# Altium PCB bdcmc25.PcbDoc (part 4 of 4)
Units mil, origin at the board's own origin, x right, y up, seen from the top; angles counter-clockwise.
Board outline 7750 x 2750 mil, 4 copper layers (Layer 1, Layer 2 (GND), Layer 3 (GND), Layer 4), stack 23.756 mil thick; 330 components, 156 nets, 997 pads, 1122 vias.
Unrouted connection lines stored in the file: 39.
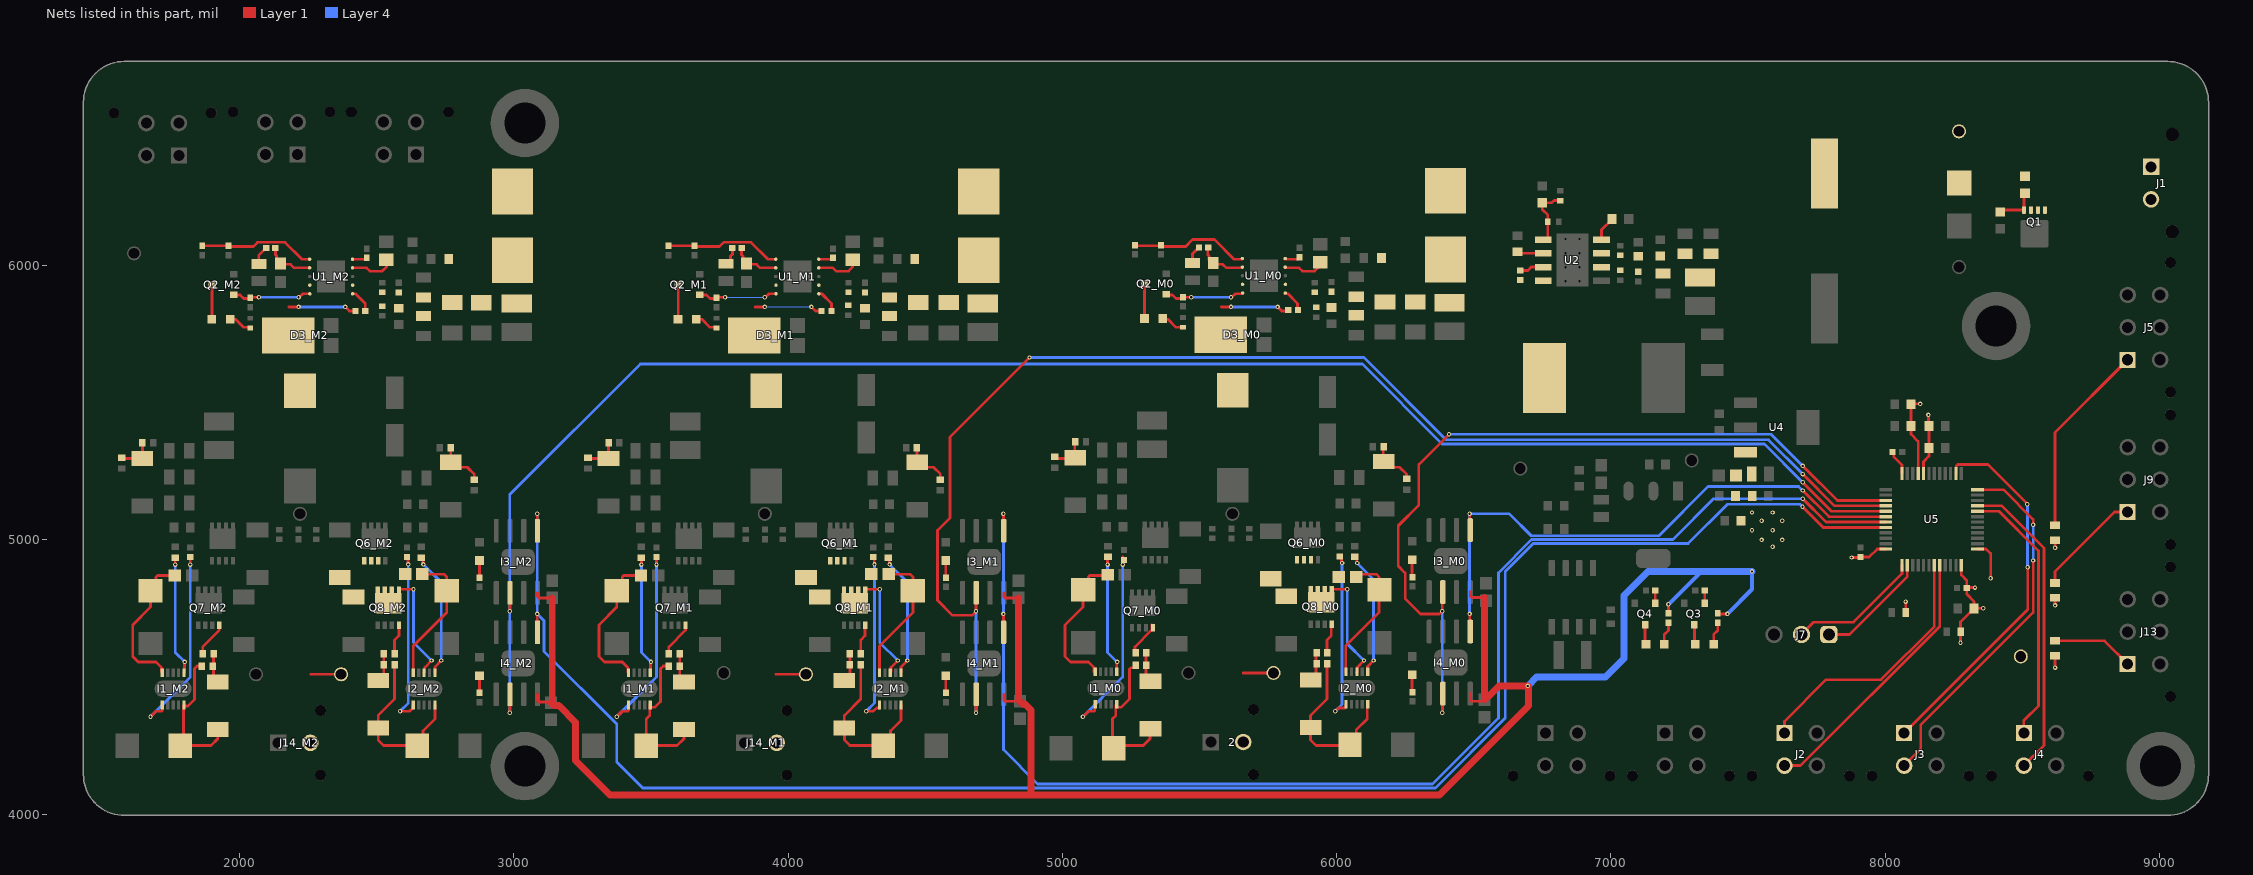
[diagram p5: the nets of this part, all layers, seen from the top]

## Via types
v1: diameter 20, hole 10, Layer 1 to Layer 4, 760 vias
v2: diameter 16, hole 8, Layer 1 to Layer 4, 340 vias
v3: diameter 23.62, hole 11.81, Layer 1 to Layer 4, 15 vias
v4: diameter 19.68, hole 7.87, Layer 1 to Layer 4, 7 vias

## Nets (pads, with @x,y where several pads share a name; then routed paths per layer and width w, separated by ;. In a path a pad name is that pad's centre, name@x,y a point inside that pad or via, vN(x,y) a via of type N, cw(c..) or ccw(c..) an arc to the next point about the centre after c; other vN are vias at no path point) (continued)
M-_M0: 2.2 C60_M0.1 C60_M1.1 C60_M2.1 D9_M0.1 D9_M1.1 D9_M2.1 D16_M0.2 D16_M1.2 D16_M2.2 I2_M0.3 I2_M1.3 I2_M2.3 J14_M1.2 J14_M2.2 Q6_M0.2 Q6_M1.2 Q6_M2.2 Q8_M0.3 Q8_M1.3 Q8_M2.3 TP9_M0.1 TP9_M1.1 TP9_M2.1 | length 1526
  Layer 1 w10: 2260,4510 TP9_M0.1@2370,4510 ; Q8_M2.3@2580.71,4815.51 2585.2,4820 v2(2633.84,4820) ; I2_M2.3@2672.47,4516.1 2675.35,4518.98 2675.35,4535.35 v2(2700,4560) ; 3955,4510 TP9_M1.1@4065,4510 ; Q8_M1.3@4280.71,4815.51 4285.2,4820 v2(4333.84,4820) ; I2_M1.3@4372.47,4516.1 4375.35,4518.98 4375.35,4535.35 v2(4400,4560) ; 5660,4515 TP9_M2.1@5770,4515 ; Q8_M0.3@5980.71,4815.51 5985.2,4820 v2(6038.84,4820) ; I2_M0.3@6072.47,4516.1 6075.35,4518.98 6075.35,4535.35 v2(6100,4560)
  Layer 4 w10: v2(2633.84,4820) 2633.84,4626.16 v2(2700,4560) ; v2(4333.84,4820) 4333.84,4626.16 v2(4400,4560) ; v2(6038.84,4820) 6038.84,4621.16 v2(6100,4560)
MOTOR_DIR_M0: I3_M0.6 I4_M0.6 U5.27 | length 3045.3
  Layer 1 w10: v2(6385,4370) 6385.43,4370.43 6385.43,4436.38 I4_M0.6@6385.87,4436.81 ; I3_M0.6@6385.87,4806.81 6385.43,4806.38 6385.43,4740.43 6375,4730 6305.86,4730 6250,4785.86 6250,4880 6225,4905 6225,5051.69 6300,5126.69 6300,5275 v2(6410,5385) ; v2(7700,5270) 7826.1,5143.9 U5.27@8002.68,5143.9
  Layer 4 w10: v2(6385,4370) v2(6385,4740) ; v2(6410,5385) 7585,5385 v2(7700,5270)
MOTOR_DIR_M1: I3_M1.6 I4_M1.6 U5.28 | length 5043.8
  Layer 1 w10: v2(4685,4370) 4685.43,4370.43 4685.43,4436.38 I4_M1.6@4685.87,4436.81 ; I3_M1.6@4685.87,4806.81 4685.43,4806.38 4685.43,4740.43 4670,4725 4600,4725 4545,4780 4545,5035 4590,5080 4590,5375 v2(4880,5665) ; v2(7700,5240) 7815.79,5124.21 U5.28@8002.68,5124.21
  Layer 4 w10: v2(4685,4370) v2(4685,4740) ; v2(4880,5665) 6099.8,5665 6399.8,5365 7575,5365 v2(7700,5240)
MOTOR_DIR_M2: I3_M2.6 I4_M2.6 U5.29 | length 6366.4
  Layer 1 w10: v2(2985,4370) 2985.43,4370.43 2985.43,4436.38 I4_M2.6@2985.87,4436.81 ; v2(2985,4740) 2985.43,4740.43 2985.43,4806.38 I3_M2.6@2985.87,4806.81 ; v2(7700,5210) 7805.47,5104.53 U5.29@8002.68,5104.53
  Layer 4 w10: v2(2985,4370) v2(2985,4740) 2985,5165 3461,5641 6094,5641 6385,5350 7560,5350 v2(7700,5210)
NetC23_M0_1: C23_M0.1 U1_M0.1 | length 87.7
  Layer 1 w10: U1_M0.1@5811.95,5897.48 5822.52,5897.48 5857.8,5862.2 C23_M0.1@5857.8,5835
NetC23_M0_2: C23_M0.2 D3_M0.3 L1_M0.1 U1_M0.9 | length 248.4
  Layer 1 w10: 5580,5850 5580.45,5849.55 v2(5615,5849.55) ; v2(5785,5849.55) 5785.45,5849.55 5800,5835 C23_M0.2@5822.2,5835
  Layer 4 w10: v2(5615,5849.55) v2(5785,5849.55)
NetC23_M1_1: C23_M1.1 U1_M1.1 | length 87.7
  Layer 1 w10: U1_M1.1@4111.95,5897.48 4122.52,5897.48 4157.8,5862.2 C23_M1.1@4157.8,5835
NetC23_M1_2: C23_M1.2 D3_M1.3 L1_M1.1 U1_M1.9 | length 248.4
  Layer 1 w10: 3880,5850 3880.45,5849.55 v2(3915,5849.55) ; v2(4085,5849.55) 4085.45,5849.55 4100,5835 C23_M1.2@4122.2,5835
  Layer 4 w4: v2(3915,5849.55) v2(4085,5849.55)
NetC23_M2_1: C23_M2.1 U1_M2.1 | length 87.7
  Layer 1 w10: U1_M2.1@2411.95,5897.48 2422.52,5897.48 2457.8,5862.2 C23_M2.1@2457.8,5835
NetC23_M2_2: C23_M2.2 D3_M2.3 L1_M2.1 U1_M2.9 | length 248.4
  Layer 1 w10: 2180,5850 2180.45,5849.55 v2(2215,5849.55) ; v2(2385,5849.55) 2385.45,5849.55 2400,5835 C23_M2.2@2422.2,5835
  Layer 4 w10: v2(2215,5849.55) v2(2385,5849.55)
NetC27_M0_1: C27_M0.1 U1_M0.4 | length 162.4
  Layer 1 w10: U1_M0.4@5811.25,5991.97 5863.03,5991.97 5875,5980 5920,5980 5935,5995 C27_M0.1@5935,6022.43
NetC27_M1_1: C27_M1.1 U1_M1.4 | length 162.4
  Layer 1 w10: U1_M1.4@4111.25,5991.97 4163.03,5991.97 4175,5980 4220,5980 4235,5995 C27_M1.1@4235,6022.43
NetC27_M2_1: C27_M2.1 U1_M2.4 | length 162.4
  Layer 1 w10: U1_M2.4@2411.25,5991.97 2463.03,5991.97 2475,5980 2520,5980 2535,5995 C27_M2.1@2535,6022.43
NetC28_M0_1: C28_M0.1 R8_M0.2 U1_M0.7 | length 177
  Layer 1 w10: R8_M0.2@5530.23,6063.94 5530.23,6039.77 5535,6035 5535,6020.9 5548.49,6007.4 5550.9,6005 5585,6005 5598.03,5991.97 U1_M0.7@5655.03,5991.97
NetC28_M1_1: C28_M1.1 R8_M1.2 U1_M1.7 | length 177
  Layer 1 w10: R8_M1.2@3830.23,6063.94 3830.23,6039.77 3835,6035 3835,6020.9 3848.49,6007.4 3850.9,6005 3885,6005 3898.03,5991.97 U1_M1.7@3955.03,5991.97
NetC28_M2_1: C28_M2.1 R8_M2.2 U1_M2.7 | length 177
  Layer 1 w10: R8_M2.2@2130.23,6063.94 2130.23,6039.77 2135,6035 2135,6020.9 C28_M2.1@2148.49,6007.4 2150.9,6005 2185,6005 2198.03,5991.97 U1_M2.7@2255.03,5991.97
NetC29_M0_1: C29_M0.1 R8_M0.1 | length 67.4
  Layer 1 w10: C29_M0.1@5475,6009.57 5475,6043.47 5491.46,6059.92 5491.46,6060.91 5497.28,6066.73 R8_M0.1@5498.27,6066.73
NetC29_M1_1: C29_M1.1 R8_M1.1 | length 67.1
  Layer 1 w10: C29_M1.1@3773.49,6006.78 3774,6006.78 3790,6022.78 3790,6035 3796.76,6041.76 R8_M1.1@3796.76,6063.94
NetC29_M2_1: C29_M2.1 R8_M2.1 | length 65.6
  Layer 1 w10: C29_M2.1@2070,6010 2070,6038.16 2095.78,6063.94 R8_M2.1@2096.76,6063.94
NetC30_1: C30.1 U2.7 | length 88.8
  Layer 1 w10: C30.1@6670,5982.8 6697.8,5982.8 6710,5995 U2.7@6753.7,5995
NetC30_2: C30.2 L2.1 U2.8 | length 3.1
  Layer 1 w10: C30.2@6670,5947.2 C30.2@6672.2,5945
NetC35_2: C35.2 R11.2 R13.1 U2.5 | length 222
  Layer 1 w10: U2.5@6753.7,6095 6760.51,6095 6770.32,6104.81 R13.1@6770.32,6160 6770.32,6184.68 6750,6205 R11.2@6750,6229.42 6784.42,6229.42 6792.48,6237.48 C35.2@6815,6237.48
NetC41_1: C41.1 U2.6 | length 96
  Layer 1 w10: C41.1@6660,6050.47 6665.47,6045 U2.6@6753.7,6045
NetC60_M0_2: C60_M0.2 D17_M0.1 I2_M0.5 | length 492
  Layer 1 w10: I2_M0.5@6033.1,4516.1 6033.1,4613.1 6155,4735 6155,4815.12 6155,4865 6145,4875 C60_M0.2@6066.5,4875
NetC60_M1_2: C60_M1.2 D17_M1.1 I2_M1.5 | length 492
  Layer 1 w10: I2_M1.5@4333.1,4516.1 4333.1,4613.1 4455,4735 4455,4815.12 4455,4865 4445,4875 C60_M1.2@4366.5,4875
NetC60_M2_2: C60_M2.2 D17_M2.1 I2_M2.5 | length 492
  Layer 1 w10: I2_M2.5@2633.1,4516.1 2633.1,4613.1 2755,4735 D17_M2.1@2755,4815.12 2755,4865 2745,4875 C60_M2.2@2666.5,4875
NetC61_M0_2: C61_M0.2 D14_M0.1 I1_M0.5 | length 537.5
  Layer 1 w10: I1_M0.5@5118.1,4516.1 5115,4519.2 5115,4535 5095,4555 5030,4555 5010,4575 5010,4690 5075,4755 5075,4815.12 5095,4835.12 5095,4865 5100,4870 C61_M0.2@5163.5,4870
NetC61_M1_2: C61_M1.2 D14_M1.1 I1_M1.5 | length 537.5
  Layer 1 w10: I1_M1.5@3418.1,4516.1 3415,4519.2 3415,4535 3395,4555 3330,4555 3310,4575 3310,4690 3375,4755 3375,4815.12 3395,4835.12 3395,4865 3400,4870 C61_M1.2@3463.5,4870
NetC61_M2_2: C61_M2.2 D14_M2.1 I1_M2.5 | length 537.5
  Layer 1 w10: I1_M2.5@1718.1,4516.1 1715,4519.2 1715,4535 1695,4555 1630,4555 1610,4575 1610,4690 1675,4755 D14_M2.1@1675,4815.12 1695,4835.12 1695,4865 1700,4870 C61_M2.2@1763.5,4870
NetC62_M0_2: C62_M0.2 I1_M0.6 | length 714.8
  Layer 1 w10: v2(5075,4355) 5095,4375 5115,4375 5118.1,4378.1 I1_M0.6@5118.1,4398 ; v2(5220,4910) C62_M0.2@5220,4937.2
  Layer 4 w10: v2(5075,4355) 5220,4500 v2(5220,4910)
NetC62_M1_2: C62_M1.2 I1_M1.6 | length 714.8
  Layer 1 w10: v2(3375,4355) 3395,4375 3415,4375 3418.1,4378.1 I1_M1.6@3418.1,4398 ; v2(3520,4910) C62_M1.2@3520,4937.2
  Layer 4 w10: v2(3375,4355) 3520,4500 v2(3520,4910)
NetC62_M2_2: C62_M2.2 I1_M2.6 | length 714.8
  Layer 1 w10: v2(1675,4355) 1695,4375 1715,4375 1718.1,4378.1 I1_M2.6@1718.1,4398 ; v2(1820,4910) C62_M2.2@1820,4937.2
  Layer 4 w10: v2(1675,4355) 1820,4500 v2(1820,4910)
NetC63_M0_2: C63_M0.2 I2_M0.6 | length 632.1
  Layer 1 w10: v2(5995,4375) 6007.25,4387.25 6030.9,4387.25 6033.7,4390.05 I2_M0.6@6033.7,4398 ; C63_M0.2@6010,4937.2 6014.39,4937.2 6017.78,4933.81 6017.78,4919.5 6020,4917.28 v2(6020,4915.66)
  Layer 4 w10: v2(5995,4375) 6020,4400 v2(6020,4915.66)
NetC63_M1_2: C63_M1.2 I2_M1.6 | length 640.2
  Layer 1 w10: v2(4285,4375) 4310,4375 4322.25,4387.25 4332.31,4387.25 4333.1,4388.04 I2_M1.6@4333.1,4398 ; C63_M1.2@4310,4937.2 4313.85,4933.35 4313.85,4911.64 v2(4315,4910.5)
  Layer 4 w10: v2(4285,4375) 4315,4405 v2(4315,4910.5)
NetC63_M2_2: C63_M2.2 I2_M2.6 | length 640.1
  Layer 1 w10: v2(2585,4375) 2619.94,4375 2632.19,4387.25 2632.19,4397.09 I2_M2.6@2633.1,4398 ; C63_M2.2@2610,4937.2 2613.85,4933.35 2613.85,4911.64 v2(2615,4910.5)
  Layer 4 w10: v2(2585,4375) 2615,4405 v2(2615,4910.5)
NetD2_M0_1: D2_M0.1 R3_M0.2 | length 86.5
  Layer 1 w10: D2_M0.1@5365.2,5804.57 5385.43,5804.57 5415,5775 5436.25,5775 R3_M0.2@5438.49,5772.76
NetD2_M0_2: D2_M0.2 Q2_M0.3 | length 138.5
  Layer 1 w10: 5295,5920 5295,5926.35 5299.12,5930.47 5299.12,5805.5 D2_M0.2@5298.2,5804.57
NetD2_M1_1: D2_M1.1 R3_M1.2 | length 86.5
  Layer 1 w10: D2_M1.1@3665.2,5804.57 3685.43,5804.57 3715,5775 3736.25,5775 R3_M1.2@3738.49,5772.76
NetD2_M1_2: D2_M1.2 Q2_M1.3 | length 138.5
  Layer 1 w10: Q2_M1.3@3595,5920 3595,5926.35 3599.12,5930.47 3599.12,5805.5 D2_M1.2@3598.2,5804.57
NetD2_M2_1: D2_M2.1 R3_M2.2 | length 86.5
  Layer 1 w10: D2_M2.1@1965.2,5804.57 1985.43,5804.57 2015,5775 2036.25,5775 R3_M2.2@2038.49,5772.76
NetD2_M2_2: D2_M2.2 Q2_M2.3 | length 138.5
  Layer 1 w10: Q2_M2.3@1895,5920 1895,5926.35 Q2_M2.3@1899.12,5930.47 1899.12,5805.5 D2_M2.2@1898.2,5804.57
NetD4_1: D4.1 R18.1 | length 85
  Layer 1 w10: D4.1@7375.2,4619.58 7375,4619.77 7375,4655 7390,4670 R18.1@7390,4698.27
NetD4_2: D4.2 Q3.3 | length 72.4
  Layer 1 w10: Q3.3@7305,4690.63 7305,4622.77 D4.2@7308.2,4619.58
NetD5_1: D5.1 R19.1 | length 85
  Layer 1 w10: D5.1@7195.2,4619.58 7195,4619.77 7195,4655 7210,4670 R19.1@7210,4698.27
NetD5_2: D5.2 Q4.3 | length 72.4
  Layer 1 w10: Q4.3@7125,4690.63 7125,4622.77 D5.2@7128.2,4619.58
NetD6_M0_1: D6_M0.1 R22_M0.1 R23_M0.1 | length 134.8
  Layer 1 w10: R22_M0.1@4970,5299.69 4973.07,5296.61 5045,5296.61 5045.32,5296.93 R23_M0.1@5045.32,5355
NetD6_M1_1: D6_M1.1 R22_M1.1 R23_M1.1 | length 134.8
  Layer 1 w10: R22_M1.1@3270,5299.69 3273.07,5296.61 3345,5296.61 3345.32,5296.93 R23_M1.1@3345.32,5355
NetD6_M2_1: D6_M2.1 R22_M2.1 R23_M2.1 | length 134.8
  Layer 1 w10: R22_M2.1@1570,5299.69 1573.07,5296.61 D6_M2.1@1645,5296.61 1645.32,5296.93 R23_M2.1@1645.32,5355
NetD7_M0_1: D7_M0.1 R24_M0.1 R25_M0.1 | length 176.7
  Layer 1 w10: R24_M0.1@6169.69,5336.61 6169.69,5283.54 6170,5283.23 6188.23,5265 6230,5265 6255,5240 R25_M0.1@6255,5219.69
NetD7_M1_1: D7_M1.1 R24_M1.1 R25_M1.1 | length 176.7
  Layer 1 w10: R24_M1.1@4469.69,5336.61 4469.69,5283.54 4470,5283.23 4488.23,5265 4530,5265 4555,5240 R25_M1.1@4555,5219.69
NetD7_M2_1: D7_M2.1 R24_M2.1 R25_M2.1 | length 176.7
  Layer 1 w10: R24_M2.1@2769.69,5336.61 2769.69,5283.54 D7_M2.1@2770,5283.23 2788.23,5265 2830,5265 2855,5240 R25_M2.1@2855,5219.69
NetD10_M0_2: D10_M0.2 D11_M0.2 I1_M0.10 R28_M0.1 | length 534.8
  Layer 1 w10: R28_M0.1@5265.32,4540 5265.32,4539.32 5260.01,4534.02 5250.86,4534.02 5245,4528.16 5245,4420 5215,4390 5200.75,4390 5196.84,4393.91 5196.84,4398 5195,4396.16 5195,4360 5182.8,4347.8 5182.8,4250 5295,4250 5320,4275 D11_M0.2@5320,4308.39
NetD10_M1_2: D10_M1.2 D11_M1.2 I1_M1.10 R28_M1.1 | length 541.4
  Layer 1 w10: R28_M1.1@3565.32,4540 3545,4540 3535,4530 3535,4410 3515,4390 3500.75,4390 3496.84,4393.91 3496.84,4398 3495,4396.16 3495,4360 3482.8,4347.8 3482.8,4250 3595,4250 3620,4275 D11_M1.2@3620,4308.39
NetD10_M2_2: D10_M2.2 D11_M2.2 I1_M2.10 R28_M2.1 | length 531.9
  Layer 1 w10: R28_M2.1@1865.32,4540 1845,4540 1835,4530 1835,4417.81 1811.89,4394.7 1797.75,4394.7 1796.84,4395.6 I1_M2.10@1796.84,4398 1795,4396.16 1795,4262.2 D10_M2.2@1782.8,4250 1895,4250 1920,4275 D11_M2.2@1920,4308.39
NetD11_M0_1: D11_M0.1 R28_M0.2 R30_M0.1 | length 130.9
  Layer 1 w10: R30_M0.1@5304.69,4585 5304.69,4540 5304.69,4496.93 5320,4481.61 D11_M0.1@5335,4496.61
NetD11_M1_1: D11_M1.1 R28_M1.2 R30_M1.1 | length 130.9
  Layer 1 w10: R30_M1.1@3604.69,4585 3604.69,4540 3604.69,4496.93 3620,4481.61 D11_M1.1@3635,4496.61
NetD11_M2_1: D11_M2.1 R28_M2.2 R30_M2.1 | length 130.9
  Layer 1 w10: R30_M2.1@1904.69,4585 1904.69,4540 1904.69,4496.93 D11_M2.1@1920,4481.61 D11_M2.1@1935,4496.61
NetD12_M0_1: D12_M0.1 R29_M0.2 R31_M0.1 | length 106.8
  Layer 1 w10: D12_M0.1@5905,4486.61 5925.32,4506.93 5925.32,4545 R31_M0.1@5925.32,4585
NetD12_M0_2: D12_M0.2 D13_M0.2 I2_M0.10 R29_M0.1 | length 624.9
  Layer 1 w10: D12_M0.2@5905,4313.39 5905,4360 5964.69,4419.69 R29_M0.1@5964.69,4545 ; D12_M0.2@5905.12,4313.39 5905.12,4269.88 5925,4250 6047.2,4250 6071.43,4274.22 6071.43,4306.43 6111.84,4346.84 I2_M0.10@6111.84,4398
NetD12_M1_1: D12_M1.1 R29_M1.2 R31_M1.1 | length 106.8
  Layer 1 w10: D12_M1.1@4205,4486.61 4225.32,4506.93 4225.32,4545 R31_M1.1@4225.32,4585
NetD12_M1_2: D12_M1.2 D13_M1.2 I2_M1.10 R29_M1.1 | length 624.9
  Layer 1 w10: D12_M1.2@4205,4313.39 4205,4360 4264.69,4419.69 R29_M1.1@4264.69,4545 ; D12_M1.2@4205.12,4313.39 4205.12,4269.88 4225,4250 4347.2,4250 4373.63,4276.43 4373.63,4303.63 4411.84,4341.84 I2_M1.10@4411.84,4398
NetD12_M2_1: D12_M2.1 R29_M2.2 R31_M2.1 | length 106.8
  Layer 1 w10: D12_M2.1@2505,4486.61 2525.32,4506.93 R29_M2.2@2525.32,4545 R31_M2.1@2525.32,4585
NetD12_M2_2: D12_M2.2 D13_M2.2 I2_M2.10 R29_M2.1 | length 625
  Layer 1 w10: R29_M2.1@2564.69,4545 2564.69,4419.69 2505,4360 D12_M2.2@2505,4313.39 2505,4270 2525,4250 D13_M2.2@2647.2,4250 2668.63,4271.43 2668.63,4303.63 2711.84,4346.84 I2_M2.10@2711.84,4398
NetD18_M0_1: D18_M0.1 R32_M0.2 | length 63.2
  Layer 1 w10: D18_M0.1@6274.58,4924.8 6274.58,4862.16 R32_M0.2@6275,4861.73
NetD18_M1_1: D18_M1.1 R32_M1.2 | length 63.2
  Layer 1 w10: D18_M1.1@4574.58,4924.8 4574.58,4862.16 R32_M1.2@4575,4861.73
NetD18_M2_1: D18_M2.1 R32_M2.2 | length 63.2
  Layer 1 w10: D18_M2.1@2874.58,4924.8 2874.58,4862.16 R32_M2.2@2875,4861.73
NetD19_M0_1: D19_M0.1 R33_M0.2 | length 63.2
  Layer 1 w10: D19_M0.1@6274.58,4504.8 6274.58,4442.16 R33_M0.2@6275,4441.73
NetD19_M1_1: D19_M1.1 R33_M1.2 | length 63.2
  Layer 1 w10: D19_M1.1@4574.58,4504.8 4574.58,4442.16 R33_M1.2@4575,4441.73
NetD19_M2_1: D19_M2.1 R33_M2.2 | length 63.2
  Layer 1 w10: D19_M2.1@2874.58,4504.8 2874.58,4442.16 R33_M2.2@2875,4441.73
NetF2_2: F2.2 J5.P$1 | length 713.9
  Layer 1 w10: F2.2@8620,5052.75 8620,5391.89 J5.P$1@8885,5656.89
NetF3_2: F3.2 J9.P$1 | length 397.1
  Layer 1 w10: F3.2@8620,4842.75 8620,4885 8836.89,5101.89 J9.P$1@8885,5101.89
NetF4_2: F4.2 J13.P$1 | length 300.2
  Layer 1 w10: F4.2@8620,4631.75 8800.14,4631.75 J13.P$1@8885,4546.89
NetI1_M0_1: I1_M0.1 R26_M0.2 | length 435
  Layer 1 w10: v2(5165,4910) R26_M0.2@5165,4935.32 ; I1_M0.1@5196.84,4516.1 5198.42,4517.68 5198.42,4553.42 v2(5200,4555)
  Layer 4 w10: v2(5165,4910) 5165,4590 v2(5200,4555)
NetI1_M1_1: I1_M1.1 R26_M1.2 | length 435
  Layer 1 w10: v2(3465,4910) R26_M1.2@3465,4935.32 ; I1_M1.1@3496.84,4516.1 3498.42,4517.68 3498.42,4553.42 v2(3500,4555)
  Layer 4 w10: v2(3465,4910) 3465,4590 v2(3500,4555)
NetI1_M2_1: I1_M2.1 R26_M2.2 | length 435
  Layer 1 w10: v2(1765,4910) R26_M2.2@1765,4935.32 ; I1_M2.1@1796.84,4516.1 1798.42,4517.68 1798.42,4553.42 v2(1800,4555)
  Layer 4 w10: v2(1765,4910) 1765,4590 v2(1800,4555)
NetI2_M0_1: I2_M0.1 R27_M0.2 | length 460.6
  Layer 1 w10: R27_M0.2@6065,4935.32 6069.83,4935.32 6073.85,4931.3 6073.85,4916.8 v2(6075,4915.66) ; I2_M0.1@6111.84,4516.1 6111.84,4536.84 v2(6135,4560)
  Layer 4 w10: v2(6075,4915.66) 6135,4855.66 v2(6135,4560)
NetI2_M1_1: I2_M1.1 R27_M1.2 | length 457.8
  Layer 1 w10: R27_M1.2@4365,4935.32 4368.85,4931.46 4368.85,4911.64 v2(4370,4910.5) ; I2_M1.1@4411.84,4516.1 4411.84,4536.84 v2(4435,4560)
  Layer 4 w10: v2(4370,4910.5) 4435,4845.5 v2(4435,4560)
NetI2_M2_1: I2_M2.1 R27_M2.2 | length 457.8
  Layer 1 w10: R27_M2.2@2665,4935.32 2668.85,4931.46 2668.85,4911.64 v2(2670,4910.5) ; I2_M2.1@2711.84,4516.1 2711.84,4536.84 v2(2735,4560)
  Layer 4 w10: v2(2670,4910.5) 2735,4845.5 v2(2735,4560)
NetJ1_2: J1.2 Q1.2
NetQ1_1: Q1.1 R1.2 R2.1 | length 152.6
  Layer 1 w10: R2.1@8420,6195.58 8427.3,6202.87 Q1.1@8506.61,6202.87 8506.61,6261.03 R1.2@8510,6264.42
NetQ3_1: Q3.1 R16.1 | length 45.9
  Layer 1 w4: R16.1@7341.73,4815 R16.1@7342.4,4814.33
  Layer 1 w10: Q3.1@7342.4,4769.37 R16.1@7342.4,4814.33
NetQ4_1: Q4.1 R17.1 | length 45.9
  Layer 1 w4: R17.1@7161.73,4815 R17.1@7162.4,4814.33
  Layer 1 w10: Q4.1@7162.4,4769.37 R17.1@7162.4,4814.33
NetQ7_M0_1: Q7_M0.1 R30_M0.2 | length 129.8
  Layer 1 w10: R30_M0.2@5265.32,4585 5265,4585.32 5265,4610 5325.71,4670.71 Q7_M0.1@5325.71,4689.53
NetQ7_M1_1: Q7_M1.1 R30_M1.2 | length 129.8
  Layer 1 w10: R30_M1.2@3565.32,4585 3565,4585.32 3565,4610 3625.71,4670.71 Q7_M1.1@3625.71,4689.53
NetQ7_M2_1: Q7_M2.1 R30_M2.2 | length 129.8
  Layer 1 w10: R30_M2.2@1865.32,4585 1865,4585.32 1865,4610 1925.71,4670.71 Q7_M2.1@1925.71,4689.53
NetQ8_M0_1: Q8_M0.1 R31_M0.2 | length 111.2
  Layer 1 w10: R31_M0.2@5964.69,4585 5965,4585.31 5965,4635 5980.71,4650.71 Q8_M0.1@5980.71,4689.53
NetQ8_M1_1: Q8_M1.1 R31_M1.2 | length 111.2
  Layer 1 w10: R31_M1.2@4264.69,4585 4265,4585.31 4265,4635 4280.71,4650.71 Q8_M1.1@4280.71,4689.53
NetQ8_M2_1: Q8_M2.1 R31_M2.2 | length 111.2
  Layer 1 w10: R31_M2.2@2564.69,4585 2565,4585.31 2565,4635 2580.71,4650.71 Q8_M2.1@2580.71,4689.53
NetR7_M0_2: R7_M0.2 R10_M0.1 U1_M0.6 | length 432.4
  Layer 1 w10: R7_M0.2@5263.49,6072.2 5358.49,6072.2 5360.7,6070 5450,6070 5475,6095 5555,6095 5626.54,6023.46 U1_M0.6@5655.03,6023.46
NetR7_M1_2: R7_M1.2 R10_M1.1 U1_M1.6 | length 424.2
  Layer 1 w10: R7_M1.2@3563.49,6072.2 3658.49,6072.2 3660.7,6070 3750,6070 3765,6085 3865,6085 3926.54,6023.46 U1_M1.6@3955.03,6023.46
NetR7_M2_2: R7_M2.2 R10_M2.1 U1_M2.6 | length 424.2
  Layer 1 w10: R7_M2.2@1863.49,6072.2 R10_M2.1@1958.49,6072.2 1960.7,6070 2050,6070 2065,6085 2165,6085 2226.54,6023.46 U1_M2.6@2255.03,6023.46
NetR9_M0_1: R9_M0.1 U1_M0.5 | length 55
  Layer 1 w10: U1_M0.5@5811.25,6023.46 5859.2,6023.46 5860.17,6024.43 5863.49,6027.76 R9_M0.1@5863.49,6028.74
NetR9_M1_1: R9_M1.1 U1_M1.5 | length 55
  Layer 1 w10: U1_M1.5@4111.25,6023.46 4159.2,6023.46 4160.17,6024.43 4163.49,6027.76 R9_M1.1@4163.49,6028.74
NetR9_M2_1: R9_M2.1 U1_M2.5 | length 55
  Layer 1 w10: U1_M2.5@2411.25,6023.46 2459.2,6023.46 2460.17,6024.43 2463.49,6027.76 R9_M2.1@2463.49,6028.74
NetR12_1: R12.1 U2.4 | length 90.8
  Layer 1 w10: U2.4@6966.3,6095 6966.3,6130.83 7004.42,6168.95 R12.1@7004.42,6170
PGOOD_M0: Q2_M0.1 R5_M0.2 U1_M0.10 | length 290.5
  Layer 1 w10: Q2_M0.1@5377.86,5893.07 5401.93,5893.07 5415,5880 5436.29,5880 5438.49,5882.2 5441.29,5885 v2(5470,5885) ; v2(5615,5885) 5618.25,5885 5630.73,5897.48 U1_M0.10@5655.74,5897.48
  Layer 4 w10: v2(5470,5885) v2(5615,5885)
PGOOD_M1: Q2_M1.1 R5_M1.2 U1_M1.10 | length 290.5
  Layer 1 w10: Q2_M1.1@3677.86,5893.07 3701.93,5893.07 3715,5880 3736.29,5880 3738.49,5882.2 3741.29,5885 v2(3770,5885) ; v2(3915,5885) 3918.25,5885 3930.73,5897.48 U1_M1.10@3955.74,5897.48
  Layer 4 w4: v2(3770,5885) v2(3915,5885)
PGOOD_M2: Q2_M2.1 R5_M2.2 U1_M2.10 | length 290.5
  Layer 1 w10: Q2_M2.1@1977.86,5893.07 2001.93,5893.07 2015,5880 2036.29,5880 R5_M2.2@2038.49,5882.2 2041.29,5885 v2(2070,5885) ; v2(2215,5885) 2218.25,5885 2230.73,5897.48 U1_M2.10@2255.74,5897.48
  Layer 4 w10: v2(2070,5885) v2(2215,5885)
PWM_IN_M0: I3_M0.1 I4_M0.1 U5.30 | length 2165.3
  Layer 1 w10: v2(6485,4730) 6485.43,4729.57 6485.43,4663.62 I4_M0.1@6485.87,4663.19 ; v2(6485,5095) 6485.43,5094.57 6485.43,5033.62 I3_M0.1@6485.87,5033.19 ; v2(7700,5180) 7795.16,5084.84 U5.30@8002.68,5084.84
  Layer 4 w10: v2(6485,4730) v2(6485,5095) 6630,5095 6710,5015 7175,5015 7355,5195 7685,5195 v2(7700,5180)
PWM_IN_M1: I3_M1.1 I4_M1.1 U5.31 | length 5035.4
  Layer 1 w10: v2(4785,4730) 4785.43,4729.57 4785.43,4663.62 I4_M1.1@4785.87,4663.19 ; v2(4785,5095) 4785.43,5094.57 4785.43,5033.62 I3_M1.1@4785.87,5033.19 ; v2(7700,5150) 7784.84,5065.16 U5.31@8002.68,5065.16
  Layer 4 w10: v2(4785,5095) v2(4785,4730) 4785,4235 4910,4110 5681.92,4110 5682.16,4109.76 5711.09,4109.76 5711.32,4110 6350,4110 6590,4350 6590,4880 6711,5001 7226,5001 7375,5150 v2(7700,5150)
PWM_IN_M2: I3_M2.1 I4_M2.1 U5.32 | length 6598.6
  Layer 1 w10: v2(3085,4730) 3085.43,4729.57 3085.43,4663.62 I4_M2.1@3085.87,4663.19 ; v2(3085,5095) 3085.43,5094.57 3085.43,5033.62 I3_M2.1@3085.87,5033.19 ; v2(7699.18,5120.82) 7774.53,5045.47 U5.32@8002.68,5045.47
  Layer 4 w10: v2(3085,5095) v2(3085,4730) 3110,4705 3110,4593.35 3375,4328.35 3375,4190 3470,4095 6360,4095 6615,4350 6615,4885 6717,4987 7282,4987 7425,5130 7690,5130 v2(7699.18,5120.82)
QUAD_0_A: J2.P$1 U5.43 | length 956.3
  Layer 1 w10: J2.P$1@7633.44,4295 7633.44,4338.44 7785.19,4490.19 7985.39,4490.19 8179.84,4684.64 U5.43@8179.84,4907.68
QUAD_0_B: J2.P$3 U5.44 | length 999.5
  Layer 1 w10: J2.P$3@7633.44,4176.89 7691.89,4176.89 8199.53,4684.53 U5.44@8199.53,4907.68
QUAD_1_A: J3.P$1 U5.14 | length 1371.4
  Layer 1 w10: J3.P$1@8069.69,4295 8520,4745.31 v2(8520,4900) ; U5.14@8258.58,5242.32 8259.58,5243.32 8259.58,5268.96 8265.44,5274.82 8375.18,5274.82 8518.84,5131.16 v2(8518.84,5130)
  Layer 4 w10: v2(8518.84,5130) 8519.42,5129.42 8519.42,4900.58 v2(8520,4900)
QUAD_1_B: J3.P$3 U5.12 | length 1340.4
  Layer 1 w10: J3.P$3@8069.69,4176.89 8130,4237.2 8130,4325 8540,4735 v2(8540,4925) ; U5.12@8337.32,5183.27 8431.73,5183.27 8540,5075 v2(8540,5055)
  Layer 4 w10: v2(8540,4925) v2(8540,5055)
QUAD_2_A: J4.P$1 U5.8 | length 969.9
  Layer 1 w10: U5.8@8337.32,5104.53 8415.47,5104.53 8560,4960 8560,4395 8505.94,4340.94 J4.P$1@8505.94,4295
QUAD_2_B: J4.P$3 U5.9 | length 1130.3
  Layer 1 w10: U5.9@8337.32,5124.21 8425.79,5124.21 8580,4970 8580,4250.95 J4.P$3@8505.94,4176.89
SWCLK: J7.1 U5.38 | length 415.3
  Layer 1 w10: J7.1@7795,4655 7870,4655 8081.42,4866.42 U5.38@8081.42,4907.68
SWDIO: J7.2 U5.37 | length 489.5
  Layer 1 w10: J7.2@7695,4655 7740,4700 7885,4700 8061.73,4876.73 U5.37@8061.73,4907.68
VBAT: C1.2 C2.1 C3.2 C4.2 C5.2 C6.2 C7.2 C8.2 C36.1 C37.1 D1.1 F1_M0.1 F1_M1.1 F1_M2.1 J1.1 R1.1 U2.2 U2.3 VBAT.1
VBAT_FUSED: C9_M0.1 C9_M1.1 C9_M2.1 C10_M0.2 C10_M1.2 C10_M2.2 C11_M0.2 C11_M1.2 C11_M2.2 C12_M0.2 C12_M1.2 C12_M2.2 C13_M0.2 C13_M1.2 C13_M2.2 C14_M0.2 C14_M1.2 C14_M2.2 C15_M0.2 C15_M1.2 C15_M2.2 C24_M0.1 C24_M1.1 C24_M2.1 C25_M0.1 C25_M1.1 C25_M2.1 F1_M0.2 F1_M1.2 F1_M2.2 R4_M0.1 R4_M1.1 R4_M2.1 U1_M0.2 U1_M1.2 U1_M2.2
VBAT_MCU: 3V3.1 C31.1 C32.1 C33.2 C34.2 C47.1 C48.2 C49.2 C50.2 C51.2 C52.2 C53.2 C54.2 C55.2 F2.1 F3.1 F4.1 R14.1 R15.1 R18.2 R19.2 U4.3 U5.1 U5.20 U5.21 U5.24 U5.36 U5.48 | length 9110
  Layer 1 w10: 3085.87,4436.81 3085.87,4413.35 3090.71,4408.5 3140,4408.5 3140,4411.5 ; 3085.87,4806.81 3085.87,4793.35 3090.71,4788.5 3140,4788.5 ; 4785.87,4436.81 4785.87,4416.34 4790.71,4411.5 4840.12,4411.5 ; 4785.98,4806.81 4785.98,4793.35 4790.83,4788.5 4840.12,4788.5 ; 4840.12,4415.39 4840.12,4416.38 ; 6487.37,4439.61 6487.37,4416.14 6492.21,4411.3 6546.51,4411.3 ; 6487.37,4809.61 6487.37,4794.84 6492.21,4790 6540,4790 6540,4792.98 6540.68,4793.66 ; 6540,4416.5 6540,4417.48 ; R19.2@7210,4731.73 v2(7210,4765) ; R18.2@7390,4731.73 7391.73,4730 v2(7425,4730) ; v2(7878.11,4935.99) 7908.79,4935.99 C48.2@7910,4937.2 7942.2,4937.2 7971.73,4966.73 U5.36@8002.68,4966.73 ; C50.2@8032.2,5325 8032.2,5302.8 8061.73,5273.27 U5.24@8061.73,5242.32 ; v2(8075,4775) 8075.3,4774.7 8075.3,4735.3 R15.1@8075.59,4735 ; U5.21@8120.79,5242.32 8120.79,5359.21 8094.53,5385.47 C54.2@8094.53,5415 C55.2@8094.53,5495 8095.52,5495.99 v2(8128.11,5495.99) ; U5.20@8140.47,5242.32 8140,5242.79 8140,5285 8160.47,5305.47 C52.2@8160.47,5335 C53.2@8160.47,5415 8158.11,5417.37 v2(8158.11,5455.99) ; v2(8275,4625) 8275.3,4625.3 8275.3,4664.7 R14.1@8275.59,4665 8275.59,4701.06 8311.81,4737.28 8313.78,4737.28 8324.53,4748.03 C51.2@8324.53,4750 ; U5.48@8278.27,4907.68 8278.27,4871.73 8297.8,4852.2 C49.2@8297.8,4825 ; v2(8328.11,4825.99) 8298.79,4825.99 C49.2@8297.8,4825 ; U5.1@8337.32,4966.73 8368.27,4966.73 8385,4950 v2(8385,4860) ; v2(8358.11,4750.99) 8325.52,4750.99 C51.2@8324.53,4750 ; v2(8620,4534.16) F4.1@8620,4578.25 8622.25,4578.25 F4.1@8631,4569.5 ; v2(8620,4761) F3.1@8620,4789.25 ; v2(8620,4971) F2.1@8620,4999.25 ; C49.2@8297.8,4825 8297.8,4802.2 8324.53,4775.47 C51.2@8324.53,4750
  Layer 1 w25: 3135,4405.51 3144.15,4396.36 3163.64,4396.36 3225,4335 3225,4195 3350,4070 4885,4070 ; 3140,4411.5 3140,4788.5 ; 4840.12,4416.38 4840.12,4788.5 ; 4845,4411.5 4845,4410.51 4854.15,4401.36 4863.64,4401.36 4885,4380 4885,4070 ; 6540,4790 6540,4417.48 6549.15,4426.63 6551.45,4426.63 6592.52,4467.7 v2(6697.3,4467.7) ; v2@6700,4465 6700,4395 6375,4070 4885,4070
  Layer 4 w15: v2(7210,4765) 7330,4885 ; v2(7425,4730) 7515,4820 v2(7515,4885)
  Layer 4 w25: v2(6697.3,4467.7) 6729.59,4500 6980,4500 7047.5,4567.5 7047.5,4797.5 7135,4885 7330,4885 v2(7515,4885)
  other v2: 7590,4975 7550,5000 7625,5000 7515,5035 7590,5035 7550,5070 7625,5070 7515,5100 7590,5100
pads on no net: 2.M1 2.M2 I1_M0.2 I1_M1.2 I1_M2.2 I2_M0.2 I2_M1.2 I2_M2.2 I3_M0.3 I3_M0.7 I3_M0.9 I3_M1.3 I3_M1.7 I3_M1.9 I3_M2.3 I3_M2.7 I3_M2.9 I4_M0.3 I4_M0.7 I4_M0.9 I4_M1.3 I4_M1.7 I4_M1.9 I4_M2.3 I4_M2.7 I4_M2.9 J1.M1 J1.M2 J2.1 J3.1 J4.1 J5.1 J6.1 J8.1 J9.1 J10.1 J11.1 J12.1 J13.1 J14_M1.M1 J14_M1.M2 J14_M2.M1 J14_M2.M2 U2.10 U2.11 U2.12 U2.13 U2.14 U2.15 U2.16 U2.17 U5.6 U5.7 U5.10 U5.11 U5.13 U5.15 U5.16 U5.17 U5.18 U5.42 U5.45 U6.5

## Polygon pours and split planes (outlines as drawn)
VBAT_FUSED on Layer 1 "NONET_L01_P000" (solid, shelved, pour order 0): 3090,6120 3095,6115 3095,5839.8 3065.2,5810 2730,5810 2710,5790 2630,5790 2600,5820 2555,5820 2535,5840 2505,5840 2430,5915 2427.98,5922.09 2427.98,5935.87 2465,5935.87 2490,5920 2700,5920 2740,5960 2740,6055 2805,6120
NetC23_M2_2 on Layer 1 "NONET_L01_P001" (solid, shelved, pour order 1): 2245,5945 2245,5915 2215,5915 2190,5890 2190,5840 2210,5820 2270,5820 2270,5650 2300,5620 2300,5465 2145,5465 2145,5575 2065,5655 2065,5845 2125,5905 2170,5905 2210,5945
12V_MOTOR_M2 on Layer 1 "NONET_L01_P002" (solid, shelved, pour order 2): 1780,5345 1815,5380 1985,5380 2100,5265 2350,5265 2520,5435 2620,5435 2645,5410 2645,5155 2640,5150 2640,5020 2660,5000 2680,5000 2690,4990 2690,4955 2575,4955 2570,4960 2435,4960 2400,4995 2400,5000 2325,5000 2305,5020 2120,5020 2120,5015 2100,4995 2095,5000 2030,5000 1990,4960 1860,4960 1855,4955 1740,4955 1740,4990 1750,5000 1770,5000 1790,5020 1790,5085 1780,5095
M+_M0 on Layer 1 "NONET_L01_P003" (solid, shelved, pour order 3): 1795,4890 1805,4900 1875,4900 1885,4910 1885,4945 1960,4945 1960,4885 1980,4865 2005,4865 2020,4880 2020,4895 2110,4895 2190,4815 2190,4230 2170,4210 2110,4210 2090,4230 2090,4720 2055,4755 1970,4755 1940,4725 1835,4725 1820,4740 1820,4835 1815,4840 1805,4840 1795,4850
M-_M0 on Layer 1 "NONET_L01_P004" (solid, shelved, pour order 4): 2440,4945 2515,4945 2515,4890 2535,4870 2565,4870 2565,4875 2580,4890 2580,4900 2630,4900 2630,4850 2595,4815 2595,4730 2485,4730 2460,4755 2370,4755 2305,4690 2310,4230 2290,4210 2230,4210 2210,4230 2215,4815 2300,4895 2395,4895 2410,4910
VBAT on Layer 1 "NONET_L01_P005" (solid, shelved, pour order 5): 9035,6400 9035,6335 8995,6295 8375,6295 8345,6265 7940,6265 7840,6165 7645,6165 7380,5900 7255,5900 7220,5935 7155,5935 7130,5960 7065,5960 7060,5965 7015,5965 7000,5980 6950,5980 6950,6060 7005,6060 7015,6050 7150,6050 7160,6060 7230,6060 7250,6080 7400,6080 7515,6195 7335,6375 6600,6375 6500,6275 6500,6175 6480,6155 6320,6155 6300,6175 6300,6280 6205,6375 4905,6375 4795,6265 4795,6175 4775,6155 4620,6155 4595,6180 4595,6275 4495,6375 3285,6375 3095,6180 3090,6180 3075,6165 2915,6165 2890,6190 2890,6360 2920,6390 3095,6390 3210,6505 3220,6515 3380,6665 8775,6660
NetJ1_2 on Layer 1 "NONET_L01_P007" (solid, shelved, pour order 7): 8995,6280 9020,6255 9020,6215 8995,6190 8605,6190 8595,6180 8530,6180 8520,6190 8520,6220 8530,6230 8590,6230 8640,6280
NetC30_2 on Layer 1 "NONET_L01_P008" (solid, shelved, pour order 8): 6755,5965 6755,5830 6850,5735 6850,5440 6835,5425 6680,5425 6645,5460 6645,5960 6650,5965
8V_TO_LDO on Layer 1 "NONET_L01_P009" (solid, shelved, pour order 9): 7265,5740 7290,5715 7290,5670 7310,5650 7410,5650 7420,5640 7420,5555 7445,5530 7535,5530 7535,5470 7445,5470 7445,5465 7415,5435 7360,5435 7275,5350 7275,5145 7265,5135 7225,5135 7215,5145 7215,5220 7210,5220 7170,5260 7170,5375 7080,5465 7080,5705 7115,5740
5V on Layer 1 "NONET_L01_P010" (solid, shelved, pour order 10): 6805,5175 6850,5220 6905,5220 6925,5240 7065,5240 7095,5210 7095,5160 7065,5130 6920,5130 6880,5090 6880,4965 6855,4940 6855,4870 6815,4870 6815,4940 6805,4950
VBAT_MCU on Layer 1 "NONET_L01_P021" (solid, shelved, pour order 21): 7615,4960 7525,4870 7500,4870 7435,4935 7435,5105 7425,5115 7425,5260 7435,5270 7435,5335 7455,5355 7535,5355 7535,5140 7555,5120 7605,5120 7655,5070 7655,5000
VBAT_FUSED on Layer 1 "NONET_L01_P022" (solid, shelved, pour order 22): 4790,6120 4795,6115 4795,5839.8 4765.2,5810 4430,5810 4410,5790 4330,5790 4300,5820 4255,5820 4235,5840 4205,5840 4130,5915 4127.98,5922.09 4127.98,5935.87 4165,5935.87 4190,5920 4400,5920 4440,5960 4440,6055 4505,6120
NetC23_M1_2 on Layer 1 "NONET_L01_P023" (solid, shelved, pour order 23): 3945,5945 3945,5915 3915,5915 3890,5890 3890,5840 3910,5820 3970,5820 3970,5650 4000,5620 4000,5465 3845,5465 3845,5575 3765,5655 3765,5845 3825,5905 3870,5905 3910,5945
12V_MOTOR_M1 on Layer 1 "NONET_L01_P024" (solid, shelved, pour order 24): 3480,5345 3515,5380 3685,5380 3800,5265 4050,5265 4220,5435 4320,5435 4345,5410 4345,5155 4340,5150 4340,5020 4360,5000 4380,5000 4390,4990 4390,4955 4275,4955 4270,4960 4135,4960 4100,4995 4100,5000 4025,5000 4005,5020 3820,5020 3820,5015 3800,4995 3795,5000 3730,5000 3690,4960 3560,4960 3555,4955 3440,4955 3440,4990 3450,5000 3470,5000 3490,5020 3490,5085 3480,5095
no net on Layer 1 "NONET_L01_P025" (solid, shelved, pour order 25): 3495,4890 3505,4900 3575,4900 3585,4910 3585,4945 3660,4945 3660,4885 3680,4865 3705,4865 3720,4880 3720,4895 3810,4895 3890,4815 3890,4230 3870,4210 3810,4210 3790,4230 3790,4720 3755,4755 3670,4755 3640,4725 3535,4725 3520,4740 3520,4835 3515,4840 3505,4840 3495,4850
no net on Layer 1 "NONET_L01_P026" (solid, shelved, pour order 26): 4140,4945 4215,4945 4215,4890 4235,4870 4265,4870 4265,4875 4280,4890 4280,4900 4330,4900 4330,4850 4295,4815 4295,4730 4185,4730 4160,4755 4070,4755 4005,4690 4010,4230 3990,4210 3930,4210 3910,4230 3915,4815 4000,4895 4095,4895 4110,4910
VBAT_FUSED on Layer 1 "NONET_L01_P027" (solid, shelved, pour order 27): 6490,6120 6495,6115 6495,5839.8 6465.2,5810 6130,5810 6110,5790 6030,5790 6000,5820 5955,5820 5935,5840 5905,5840 5830,5915 5827.98,5922.09 5827.98,5935.87 5865,5935.87 5890,5920 6100,5920 6140,5960 6140,6055 6205,6120
NetC23_M0_2 on Layer 1 "NONET_L01_P028" (solid, shelved, pour order 28): 5645,5945 5645,5915 5615,5915 5590,5890 5590,5840 5610,5820 5670,5820 5670,5650 5700,5620 5700,5465 5545,5465 5545,5575 5465,5655 5465,5845 5525,5905 5570,5905 5610,5945
12V_MOTOR_M0 on Layer 1 "NONET_L01_P029" (solid, shelved, pour order 29): 5180,5345 5215,5380 5385,5380 5500,5265 5750,5265 5920,5435 6020,5435 6045,5410 6045,5155 6040,5150 6040,5020 6060,5000 6080,5000 6090,4990 6090,4955 5975,4955 5970,4960 5835,4960 5800,4995 5800,5000 5725,5000 5705,5020 5520,5020 5520,5015 5500,4995 5495,5000 5430,5000 5390,4960 5260,4960 5255,4955 5140,4955 5140,4990 5150,5000 5170,5000 5190,5020 5190,5085 5180,5095
M+_M0 on Layer 1 "NONET_L01_P030" (solid, shelved, pour order 30): 5195,4890 5205,4900 5275,4900 5285,4910 5285,4945 5360,4945 5360,4885 5380,4865 5405,4865 5420,4880 5420,4895 5510,4895 5590,4815 5590,4230 5570,4210 5510,4210 5490,4230 5490,4720 5455,4755 5370,4755 5340,4725 5235,4725 5220,4740 5220,4835 5215,4840 5205,4840 5195,4850
M-_M0 on Layer 1 "NONET_L01_P031" (solid, shelved, pour order 31): 5840,4945 5915,4945 5915,4890 5935,4870 5965,4870 5965,4875 5980,4890 5980,4900 6030,4900 6030,4850 5995,4815 5995,4730 5885,4730 5860,4755 5770,4755 5705,4690 5710,4230 5690,4210 5630,4210 5610,4230 5615,4815 5700,4895 5795,4895 5810,4910
GND on Layer 1 "NONET_L01_P043" (solid, shelved, pour order 43): 1430,4145 1430,6595 cw(c1580,6595) 1580,6745 9030,6745 cw(c9030,6595) 9180,6595 9180,4145 cw(c9030,4145) 9030,3995 1580,3995 cw(c1580,4145)
VBAT_MCU on Layer 4 "NONET_L04_P040" (solid, shelved, pour order 40): 8297.8,4817.8 8297.8,4787.2 8300,4785 8275,4760 8255,4760 8220,4795 8030,4795 7955,4870 7895,4935 7895,4945 7885,4955 7870,4955 7860,4965 7860,4990 7870,5000 7895,5000 7895,5150 8175,5430 8175,5475 8135,5515 8120,5515 8110,5505 8110,5405 7745,5040 7685,5040 7605,5120 7495,5120 7480,5105 7480,4975 7495,4960 7615,4960 7645,4990 7740,4990 8005,4725 8210,4725 8250,4685 8250,4615 8335,4530 8630,4530 8650,4550 8650,4985 8630,5005 8605,5005 8590,4990 8590,4930 8530,4870 8350,4870
GND on Layer 4 "NONET_L04_P042" (solid, shelved, pour order 42): 1430,4145 1430,6595 cw(c1580,6595) 1580,6745 9030,6745 cw(c9030,6595) 9180,6595 9180,4145 cw(c9030,4145) 9030,3995 1580,3995 cw(c1580,4145)
no net on Layer 3 (GND) (split plane): 1580,6724.9 9030,6724.9 9030.59,6724.96 9039.27,6724.65 9048.5,6723.66 9057.63,6722.01 9066.62,6719.72 9075.42,6716.79 9084,6713.24 9092.29,6709.08 9100.27,6704.35 9107.9,6699.06 9115.12,6693.23 9121.91,6686.91 9128.23,6680.12 9134.06,6672.9 9139.35,6665.27 9144.08,6657.29 9148.24,6649 9151.79,6640.42 9154.72,6631.62 9157.01,6622.63 9158.66,6613.5 9159.65,6604.27 9159.96,6595.59 9159.9,6595 9159.9,4145 9159.96,4144.41 9159.65,4135.73 9158.66,4126.5 9157.01,4117.37 9154.72,4108.38 9151.79,4099.58 9148.24,4091 9144.08,4082.71 9139.35,4074.73 9134.06,4067.1 9128.23,4059.88 9121.91,4053.09 9115.12,4046.77 9107.9,4040.94 9100.27,4035.65 9092.29,4030.92 9084,4026.76 9075.42,4023.21 9066.62,4020.28 9057.63,4017.99 9048.5,4016.34 9039.27,4015.35 9030.59,4015.04 9030,4015.1 1580,4015.1 1579.41,4015.04 1570.73,4015.35 1561.5,4016.34 1552.37,4017.99 1543.38,4020.28 1534.58,4023.21 1526,4026.76 1517.71,4030.92 1509.73,4035.65 1502.1,4040.94 1494.88,4046.77 1488.09,4053.09 1481.77,4059.88 1475.94,4067.1 1470.65,4074.73 1465.92,4082.71 1461.76,4091 1458.21,4099.58 1455.28,4108.38 1452.99,4117.37 1451.34,4126.5 1450.35,4135.73 1450.04,4144.41 1450.1,4145 1450.1,6595 1450.04,6595.59 1450.35,6604.27 1451.34,6613.5 1452.99,6622.63 1455.28,6631.62 1458.21,6640.42 1461.76,6649 1465.92,6657.29 1470.65,6665.27 1475.94,6672.9 1481.77,6680.12 1488.09,6686.91 1494.88,6693.23 1502.1,6699.06 1509.73,6704.35 1517.71,6709.08 1526,6713.24 1534.58,6716.79 1543.38,6719.72 1552.37,6722.01 1561.5,6723.66 1570.73,6724.65 1579.41,6724.96
no net on Layer 2 (GND) (split plane): 1580,6724.9 9030,6724.9 9030.59,6724.96 9039.27,6724.65 9048.5,6723.66 9057.63,6722.01 9066.62,6719.72 9075.42,6716.79 9084,6713.24 9092.29,6709.08 9100.27,6704.35 9107.9,6699.06 9115.12,6693.23 9121.91,6686.91 9128.23,6680.12 9134.06,6672.9 9139.35,6665.27 9144.08,6657.29 9148.24,6649 9151.79,6640.42 9154.72,6631.62 9157.01,6622.63 9158.66,6613.5 9159.65,6604.27 9159.96,6595.59 9159.9,6595 9159.9,4145 9159.96,4144.41 9159.65,4135.73 9158.66,4126.5 9157.01,4117.37 9154.72,4108.38 9151.79,4099.58 9148.24,4091 9144.08,4082.71 9139.35,4074.73 9134.06,4067.1 9128.23,4059.88 9121.91,4053.09 9115.12,4046.77 9107.9,4040.94 9100.27,4035.65 9092.29,4030.92 9084,4026.76 9075.42,4023.21 9066.62,4020.28 9057.63,4017.99 9048.5,4016.34 9039.27,4015.35 9030.59,4015.04 9030,4015.1 1580,4015.1 1579.41,4015.04 1570.73,4015.35 1561.5,4016.34 1552.37,4017.99 1543.38,4020.28 1534.58,4023.21 1526,4026.76 1517.71,4030.92 1509.73,4035.65 1502.1,4040.94 1494.88,4046.77 1488.09,4053.09 1481.77,4059.88 1475.94,4067.1 1470.65,4074.73 1465.92,4082.71 1461.76,4091 1458.21,4099.58 1455.28,4108.38 1452.99,4117.37 1451.34,4126.5 1450.35,4135.73 1450.04,4144.41 1450.1,4145 1450.1,6595 1450.04,6595.59 1450.35,6604.27 1451.34,6613.5 1452.99,6622.63 1455.28,6631.62 1458.21,6640.42 1461.76,6649 1465.92,6657.29 1470.65,6665.27 1475.94,6672.9 1481.77,6680.12 1488.09,6686.91 1494.88,6693.23 1502.1,6699.06 1509.73,6704.35 1517.71,6709.08 1526,6713.24 1534.58,6716.79 1543.38,6719.72 1552.37,6722.01 1561.5,6723.66 1570.73,6724.65 1579.41,6724.96

## Other copper
Layer 4:
  pour cut-out: 8365,5190 8285,5270 8055,5270 7975,5190 7975,4960 8055,4880 8290,4880 8365,4955

## Silkscreen, mask and mechanical layers (free items; w line width, h text height)
Top Overlay:
  lines w10: 1505,6195 2800,6195 2800,6300 ; 1505,6300 2800,6300 ; 1936.67,6300 1936.67,6665 ; 1985,4035 1985,4460 ; 2368.33,6300 2368.33,6665 ; 2445,4035 2445,4460 ; 2800,6665 2800,6300 ; 3685,4035 3685,4460 ; 4145,4035 4145,4460 ; 5385,4035 5385,4460 ; 5845,4035 5845,4460 ; 7040,4035 7040,4400 ; 7475,4035 7475,4660 7040,4660 7040,4505 6605,4505 ; 7475,4505 8675,4505 ; 7910,4035 7910,4400 ; 8345,4035 8345,4400 ; 8780,4946.67 9140,4946.67 ; 8780,5493.33 9140,5493.33 ; 8780,6575 8780,6040 ; 9140,4505 9140,4400 ; 1985,4460 1985,4565 2445,4565 2445,4460 ; 1985,4460 2445,4460 ; 3205,4035 1505,4035 1505,6665 3205,6665 ; 3205,4035 4905,4035 ; 3205,4035 3205,6665 ; 3205,6665 4905,6665 ; 3685,4460 4145,4460 ; 3685,4460 3685,4565 ; 3685,4460 4145,4460 ; 3685,4460 3685,4565 ; 3685,4565 4145,4565 ; 3685,4565 4145,4565 ; 4145,4460 4145,4565 ; 4145,4460 4145,4565 ; 4905,4035 4905,6665 ; 4905,4035 6605,4035 ; 4905,6665 6605,6665 ; 5385,4460 5385,4565 ; 5385,4460 5845,4460 ; 5385,4460 5385,4565 ; 5385,4460 5845,4460 ; 5385,4460 5845,4460 ; 5385,4460 5385,4565 ; 5385,4565 5845,4565 ; 5385,4565 5845,4565 ; 5385,4565 5845,4565 ; 5845,4460 5845,4565 ; 5845,4460 5845,4565 ; 5845,4460 5845,4565 ; 6605,4035 6605,6665 ; 6605,4035 8780,4035 8780,4400 ; 6605,4035 6605,4505 ; 6605,4505 6605,4400 8780,4400 ; 6605,6665 9140,6665 9140,6575 ; 8675,4505 8780,4400 ; 8675,4505 8675,4505 ; 8675,4505 8675,6040 ; 8675,6040 8675,6575 9140,6575 ; 8675,6040 8780,6040 ; 8780,4400 8780,6040 ; 8780,4400 9140,4400 ; 8780,6040 9140,6040 ; 9140,4400 9140,6040 ; 9140,6040 9140,6575
  text "LIM_0" at 1630.03,6231.96 h40
  text "LIM_1" at 2069.19,6231.96 h40
  text "LIM_2" at 2495.03,6231.96 h40
  text "- VBAT +" at 8749.99,6161.72 h40 r90
  text "ABS_2" at 8746.66,5681.7 h40 r90
  text "ABS_1" at 8746.66,5133.36 h40 r90
  text "ABS_0" at 8746.66,4571.7 h40 r90
  text "GND" at 7510.01,4540 h30
  text "SWDIO" at 7622.52,4540 h30
  text "SWCLK" at 7790.02,4540 h30
  text "RX" at 7131.68,4530.01 h40
  text "TX" at 7306.68,4530.01 h40
  text "+ M2 -" at 2102.1,4495.01 h40
  text "+ M1 -" at 3805.43,4495.01 h40
  text "+ M0 -" at 5502.1,4495.01 h40
  text "CAN_0" at 6726.7,4435.84 h40
  text "CAN_1" at 7168.36,4435.84 h40
  text "QUAD_0" at 7571.7,4435.84 h40
  text "QUAD_1" at 8018.37,4435.84 h40
  text "QUAD_2" at 8451.7,4435.84 h40